# EAGLE board LightDiming (EAGLE 9.5.1)

Size 160 x 100 mm. Coordinates in mm from the lower left corner, seen from the top.
Outline: 0,0 160,0 160,100 0,100 0,0
Copper layers (1*16): Top 0.035mm / dielectric 1.5mm / Bottom 0.035mm
Design rules "default": minimum track width 6mil, minimum drill 0.35mm, track to track 6mil, track to pad 6mil, pad to pad 6mil, via to via 6mil, smd to smd 6mil, copper to edge 40mil, drill to drill 6mil, minimum pad ring 10mil, minimum via ring 8mil, stop-mask expansion 4mil, vias tented up to drill 0mil, thermal gap 10mil

## Footprints (pad centres in the part's own frame; a part is rotated, then mirrored left to right if it is on the bottom)
ARDUINO_R3 = drill 1.016 pad 1.93: 3.3V 2.54,-24.13; 5V 5.08,-24.13; A0 17.78,-24.13; A1 20.32,-24.13; A2 22.86,-24.13; A3 25.4,-24.13; A4 27.94,-24.13; A5 30.48,-24.13; AREF -9.144,24.13; D0 30.48,24.13; D1 27.94,24.13; D2 25.4,24.13; D3 22.86,24.13; D4 20.32,24.13; D5 17.78,24.13; D6 15.24,24.13; D7 12.7,24.13; D8 8.636,24.13; D9 6.096,24.13; D10 3.556,24.13; D11 1.016,24.13; D12 -1.524,24.13; D13 -4.064,24.13; GND@1 7.62,-24.13; GND@2 10.16,-24.13; GND@3 -6.604,24.13; GND@4 33.16,-1.32; IOREF -2.54,-24.13; MISO 30.62,3.76; MOSI 33.16,1.22; NC -5.08,-24.13; RESET@1 0,-24.13; RESET@2 30.62,-1.32; SCK 30.62,1.22; SCL -14.224,24.13; SDA -11.684,24.13; VCC 33.16,3.76; VIN 12.7,-24.13 | hole 3.175: -17.78,24.13; 33.02,8.89; 33.02,-19.05; -19.05,-24.13
B-DIL = drill 0.813: + -2.54,-3.81 | drill 0.813 octagon: - 2.54,-3.81; AC1 2.54,3.81; AC2 -2.54,3.81
TO220DS = drill 1.016 long: A1 -2.54,-2.54; A2 0,-2.54; G 2.54,-2.54
LED3MM = drill 0.813 octagon: A -1.27,0; K 1.27,0
LDH-5R = drill 0.813 long: 1 -1.27,-5.08; 2 1.27,-5.08 | hole 1.219: 2.54,0; -2.54,0
DIL06 = drill 0.813 offset: 1 -2.54,-3.81; 2 0,-3.81; 3 2.54,-3.81; 4 2.54,3.81; 5 0,3.81; 6 -2.54,3.81
SMR-0 = smd 2.8 x 5.8: 1 5.029,0; 2 -5.029,0
EI42-1B = drill 1.118 pad 3.81 octagon: 1 -12.497,12.497; 5 -12.497,-12.497 | drill 1.118 pad 3.175 octagon: 6 12.497,-12.497; 7 12.497,-7.493; 9 12.497,7.493; 10 12.497,12.497 | hole 4.115: 0,-27.508; 0,27.508

## Placement (x,y rotation side)
B1  ARDUINO_UNO_R3  [ARDUINO_R3]  81.28,31.75 0 top
DF04M  [B-DIL]  44.45,69.85 0 bottom
L2004L3  TIC225S  [TO220DS]  35.56,91.44 0 bottom
LED1  TLLR4400  [LED3MM]  76.2,76.2 0 top
LMP1  [LDH-5R]  6.35,97.79 0 top
OK1  4N25M  [DIL06]  111.76,78.74 0 top
OK2  MOC3021M  [DIL06]  71.12,88.9 0 top
R1  [SMR-0]  128.27,91.44 0 top
R2  [SMR-0]  80.01,68.58 0 top
R3  [SMR-0]  26.67,69.85 0 top
R4  [SMR-0]  92.71,88.9 0 bottom
R5  [SMR-0]  52.07,88.9 0 top
R6  [SMR-0]  59.69,69.85 0 top
TR1  [EI42-1B]  19.05,30.48 0 top

## Library data of the parts
B1 = SparkFun-Boards
DF04M = rectifier
L2004L3 = triac
LED1 = led; MF: VISHAY SEMICONDUCTOR; OC_FARNELL: 1612437
LMP1 = special
OK1 = optocoupler; MPN: 4N25-M; OC_FARNELL: 1021349; OC_NEWARK: 98K9084
OK2 = optocoupler; MF: FAIRCHILD SEMICONDUCTOR; MPN: MOC3021-M; OC_FARNELL: 1021365; OC_NEWARK: 95B7895
R1-R6 = resistor-shunt; OC_FARNELL: unknown; OC_NEWARK: unknown
TR1 = trafo

## Nets
5V: R1.1
GND: LMP1.1 OK1.4 OK2.2 R4.2 TR1.7
IO0: B1.D7 R2.1
IO2: B1.D0 OK1.5 R1.2
N$1: DF04M.+ R6.2
N$2: LED1.A R2.2
N$3: LED1.K OK2.1
N$6: OK2.6 R5.1
N$7: L2004L3.G OK2.4
N$8: OK1.1 R6.1
N$9: DF04M.- OK1.2
N$10: DF04M.AC1 R4.1
N$11: B1.A0
N$12: L2004L3.A2 R3.2 R5.2 TR1.9
N$13: DF04M.AC2 R3.1
N$14: B1.5V
N$15: L2004L3.A1 LMP1.2
N$16: B1.GND@4

## Tracks (layer width: path | path; a pad name or v marks a point on that pad's centre or on a via)
GND  (4 unrouted)
IO0  (1 unrouted)
IO2  (2 unrouted)
N$1  (1 unrouted)
N$2  (1 unrouted)
N$3  (1 unrouted)
N$6  (1 unrouted)
N$7  (1 unrouted)
N$8  (1 unrouted)
N$9  (1 unrouted)
N$10  (1 unrouted)
N$12  (3 unrouted)
N$13  (1 unrouted)
N$15  (1 unrouted)